# Altium PCB main.PcbDoc
Units mm, origin at the board's own origin, x right, y up, seen from the top; angles counter-clockwise.
Board outline 30 x 30 mm, 2 copper layers (Top Layer, Bottom Layer); 51 components, 33 nets, 109 pads, 0 vias.
Unrouted connection lines stored in the file: 53.
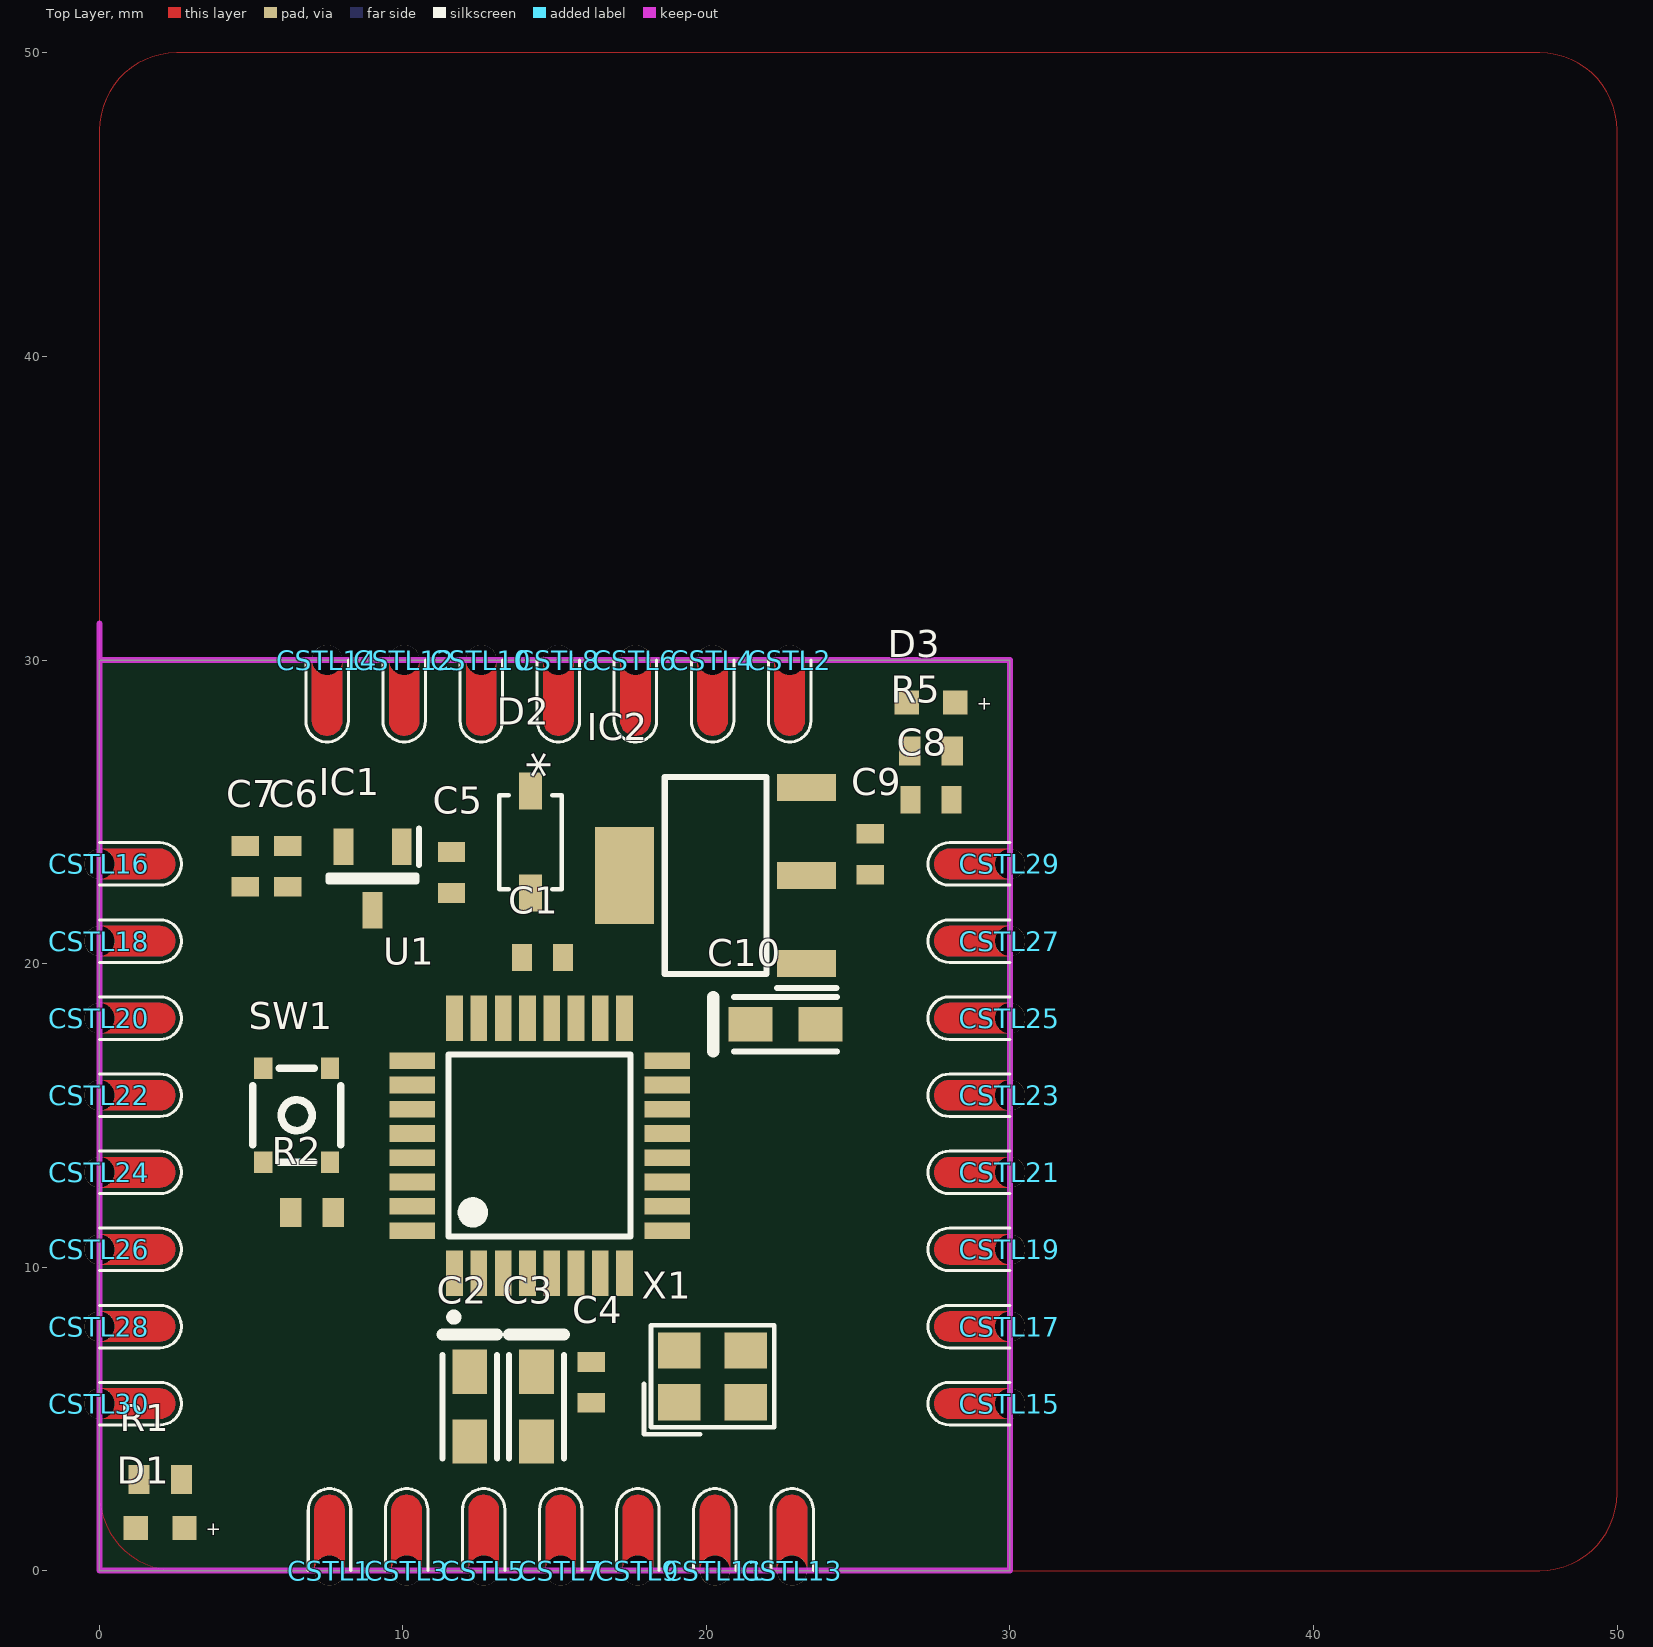
[diagram p0: Top Layer view]
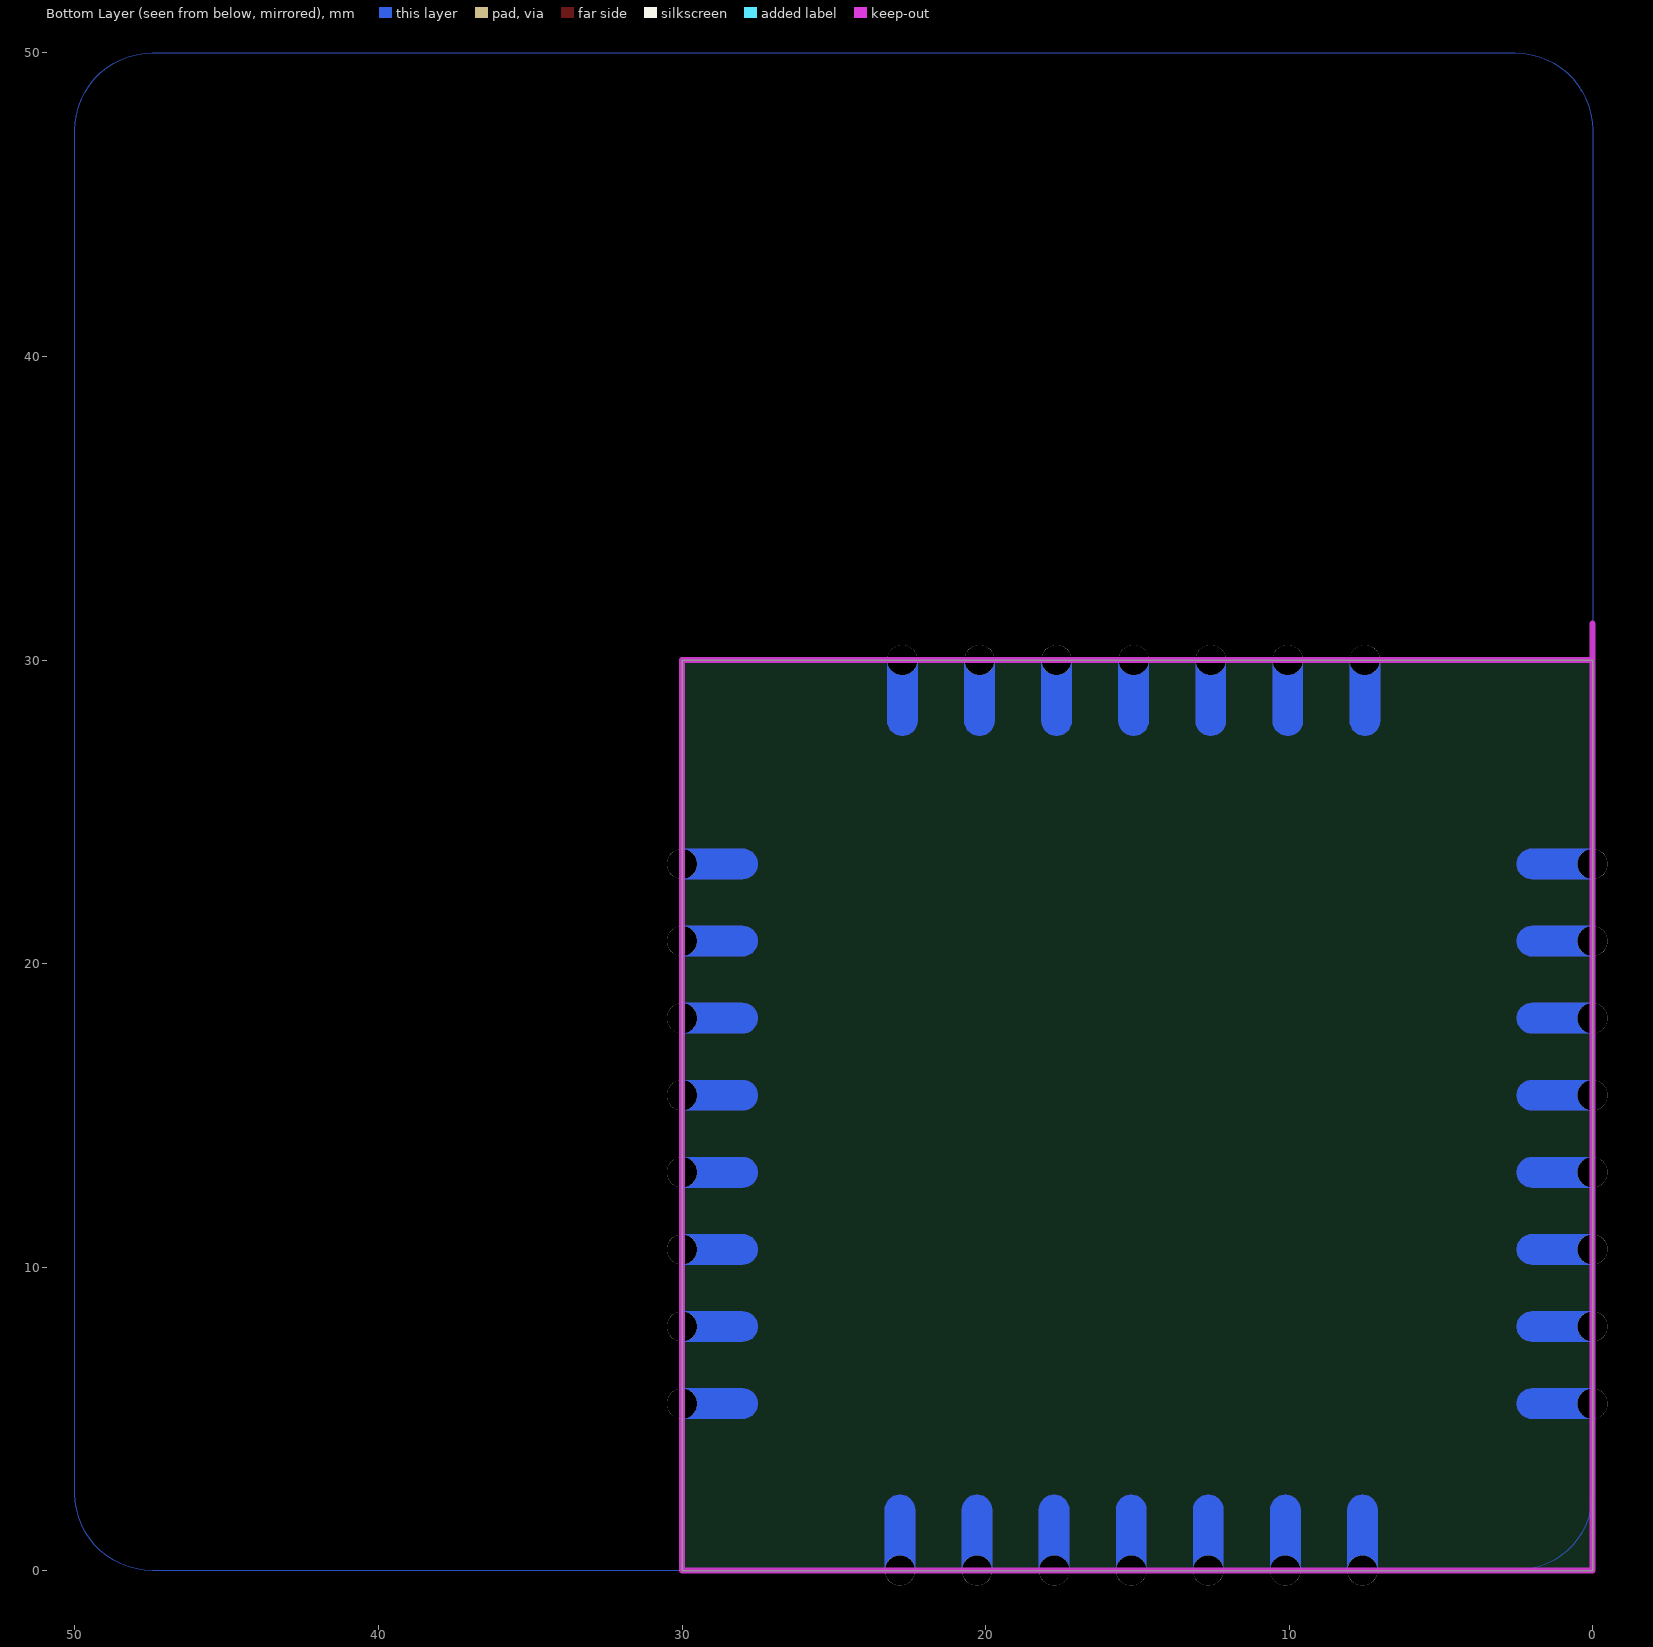
[diagram p1: Bottom Layer view, seen from below]

## Layer stack, top to bottom
Top Solder: solder mask 0.0102, Solder Resist, Dk 3.5
Top Layer: signal copper 0.0356
Dielectric 1: dielectric 0.32, FR-4, Dk 4.8
Bottom Layer: signal copper 0.0356
Bottom Solder: solder mask 0.0102, Solder Resist, Dk 3.5

## Board outline
0,0 0,30 30,30 30,0

## Design rules (kind name [scope] priority, off if disabled: settings)
Clearance Polygon [InPolygon] p1: gap=0.254 ignorepadtopadclearanceinfootprint=FALSE
Clearance "Fine Pitch" [InComponent('')] p2: gap=0.2 ignorepadtopadclearanceinfootprint=FALSE
Clearance [All] p3: gap=0.203 ignorepadtopadclearanceinfootprint=FALSE
MinimumSolderMaskSliver [All] p1 off: minsoldermaskwidth=0.254
PlaneConnect [All] p1: planeconnectstyle=Direct reliefexpansion=0.508 reliefentries=4 reliefconductorwidth=0.254 reliefairgap=0.254
PolygonConnect [All] p1: connectstyle=Direct reliefconductorwidth=0.254 reliefentries=4 polygonreliefangle="90 Angle" airgapwidth=0.254
RoutingVias [All] p1: holewidth=0.4 width=0.9 viastyle="Through Hole" minholewidth=0.4 minwidth=0.9 maxholewidth=0.4 maxwidth=0.9
SilkToSilkClearance [All] p1 off: silktosilkclearance=0.254
SilkToSolderMaskClearance [IsPad] p1 off: minsilkscreentomaskgap=0.254 clearancetoexposedcopper=TRUE
SolderMaskExpansion SolderMaskExpansion_Via [IsVia] p1: expansion=0.102 istentingtop=TRUE
SolderMaskExpansion [All] p2: expansion=0.102 istentingtop=FALSE
Width [All] p1: maxlimit=1.27 minlimit=0.203 preferedwidth=0.381
26 further rules are at their usual default settings.

## Components (designator, comment, footprint, x,y, rotation, side; value= is the part's Value field where it differs from the comment)
C1 "100nF/50V/0603" C0603_L 14.6,20.2 r180 top
C2 "4.7uF/16V/3216" KEMT-T491-A_L 12.2,5.4 r270 top
C3 "4.7uF/16V/3216" KEMT-T491-A_L 14.4,5.4 r270 top
C4 "100nF/50V/0603" C0603_L 16.2,6.2 r90 top
C5 "10uF/16V/0603" C0603_L 11.6,23 r90 top
C6 "100nF/50V/0603" C0603_L 6.2,23.2 r90 top
C7 "10uF/16V/0603" C0603_L 4.8,23.2 r90 top
C8 "10uF/16V/0603" C0603_L 27.4,25.4 r180 top
C9 "100nF/50V/0603" C0603_L 25.4,23.6 r270 top
C10 "100uF/16V/3216" KEMT-T491-A_L 22.6,18 r0 top
CSTL1 "CASTELLATED" CASTELLATED 7.58,0 r0 top
CSTL2 "CASTELLATED" CASTELLATED 22.74,30 r180 top
CSTL3 "CASTELLATED" CASTELLATED 10.12,0 r0 top
CSTL4 "CASTELLATED" CASTELLATED 20.2,30 r180 top
CSTL5 "CASTELLATED" CASTELLATED 12.66,0 r0 top
CSTL6 "CASTELLATED" CASTELLATED 17.66,30 r180 top
CSTL7 "CASTELLATED" CASTELLATED 15.2,0 r0 top
CSTL8 "CASTELLATED" CASTELLATED 15.12,30 r180 top
CSTL9 "CASTELLATED" CASTELLATED 17.74,0 r0 top
CSTL10 "CASTELLATED" CASTELLATED 12.58,30 r180 top
CSTL11 "CASTELLATED" CASTELLATED 20.28,0 r0 top
CSTL12 "CASTELLATED" CASTELLATED 10.04,30 r180 top
CSTL13 "CASTELLATED" CASTELLATED 22.82,0 r0 top
CSTL14 "CASTELLATED" CASTELLATED 7.5,30 r180 top
CSTL15 "CASTELLATED" CASTELLATED 30,5.5 r90 top
CSTL16 "CASTELLATED" CASTELLATED 0,23.28 r270 top
CSTL17 "CASTELLATED" CASTELLATED 30,8.04 r90 top
CSTL18 "CASTELLATED" CASTELLATED 0,20.74 r270 top
CSTL19 "CASTELLATED" CASTELLATED 30,10.58 r90 top
CSTL20 "CASTELLATED" CASTELLATED 0,18.2 r270 top
CSTL21 "CASTELLATED" CASTELLATED 30,13.12 r90 top
CSTL22 "CASTELLATED" CASTELLATED 0,15.66 r270 top
CSTL23 "CASTELLATED" CASTELLATED 30,15.66 r90 top
CSTL24 "CASTELLATED" CASTELLATED 0,13.12 r270 top
CSTL25 "CASTELLATED" CASTELLATED 30,18.2 r90 top
CSTL26 "CASTELLATED" CASTELLATED 0,10.58 r270 top
CSTL27 "CASTELLATED" CASTELLATED 30,20.74 r90 top
CSTL28 "CASTELLATED" CASTELLATED 0,8.04 r270 top
CSTL29 "CASTELLATED" CASTELLATED 30,23.28 r90 top
CSTL30 "CASTELLATED" CASTELLATED 0,5.5 r270 top
D1 "Red, 2V" WL-SMCW_0603_H=0.7mm 2,1.4 r0 top
D2 "1N5819HW-7-F" SOD-123 14.2,24 r270 top
D3 "Red, 2V" WL-SMCW_0603_H=0.7mm 27.4,28.6 r0 top
IC1 "AP7313-33SAG-7" SOT96P240X110-3N 9,22.8 r270 top
IC2 "AMS1117-5.0" SOT290P700X180-4N 20.3,22.9 r180 top
R1 "1k/0603" R0603_N 2,3 r180 top
R2 "1k/0603" R0603_N 7,11.8 r0 top
R5 "1k/0603" R0603_N 27.4,27 r180 top
SW1 "SKSHAAE010" SW-SMD_4P-L3.2-W2.9-P2.20-LS3.4 6.5,15 r90 top
U1 "ATmega328P-AU" FP-32A-MFG 14.5,14 r90 top
X1 "16MHz" CRYSTAL-SMD_4P-L3.2-W2.5-BL 20.2,6.4 r0 top

## Footprints (in the part's own frame and the unit in brackets; to place one, negate y for a bottom-side part, rotate by r counter-clockwise, add the part's x,y. Pads: shape width x height; smd on the part's side, far side on the other; paste and mask are expansions set on the pad)
C0603_L [mm] "Chip Capacitor, 2-Leads, Body 1.60x0.82mm, IPC High Density"
  rect 0.65x0.9 smd: 1(-0.675,0) 2(0.675,0)
  body extent -0.85,-0.48 0.85,0.48, height 0.6
CASTELLATED [mm]
  round 1 hole 1: 0(0,0)
  Multi-Layer region: -0.5,0 -0.5,2 -0.45,2.217 -0.312,2.391 -0.111,2.487 0.111,2.487 0.312,2.391 0.45,2.217 0.5,2 0.5,2 0.5,0
  silkscreen extent -0.7,0 0.7,2.7
CRYSTAL-SMD_4P-L3.2-W2.5-BL [mm]
  rect 1.4x1.2 smd: 1(-1.1,-0.85) 2(1.1,-0.85) 3(1.1,0.85) 4(-1.1,0.85)
  silkscreen extent -2.26,-1.91 2.03,1.68, body extent -1.6,-1.2 1.6,1.3, height 0.61
FP-32A-MFG [mm]
  rect 1.5x0.55 smd paste+0 mask+0: 1(-4.2,2.8) 2(-4.2,2) 3(-4.2,1.2) 4(-4.2,0.4) 5(-4.2,-0.4) 6(-4.2,-1.2) 7(-4.2,-2) 8(-4.2,-2.8) 17(4.2,-2.8) 18(4.2,-2) 19(4.2,-1.2) 20(4.2,-0.4) 21(4.2,0.4) 22(4.2,1.2) 23(4.2,2) 24(4.2,2.8)
  rect 0.55x1.5 smd paste+0 mask+0: 9(-2.8,-4.2) 10(-2,-4.2) 11(-1.2,-4.2) 12(-0.4,-4.2) 13(0.4,-4.2) 14(1.2,-4.2) 15(2,-4.2) 16(2.8,-4.2) 25(2.8,4.2) 26(2,4.2) 27(1.2,4.2) 28(0.4,4.2) 29(-0.4,4.2) 30(-1.2,4.2) 31(-2,4.2) 32(-2.8,4.2)
  silkscreen extent -5.77,-3 3,3, body extent -5.05,-5.05 5.05,5.05, height 0.25
KEMT-T491-A_L [mm] "Molded Capacitor, 2-Leads, Body 3.40x1.80mm, IPC High Density"
  rect 1.45x1.15 smd: 1(-1.15,0) 2(1.15,0)
  silkscreen extent -2.37,-0.9 1.7,0.9, body extent -1.7,-0.91 1.7,0.89, height 1.78
R0603_N [mm]
  rect 0.7x0.95 smd: 1(-0.7,0) 2(0.7,0)
  body extent -0.85,-0.48 0.85,0.47, height 0.6
SOD-123 [mil]
  rect 48x30 smd paste+0 mask+0: 1(-66,0) 2(66,0)
  silkscreen extent -61,-41 61,41, body extent -76,-36 76,36, height 53
SOT96P240X110-3N [mm]
  rect 1.2x0.65 smd: 1(-1.05,0.96) 2(-1.05,-0.96) 3(1.05,0)
  silkscreen extent -1.65,-1.45 0.1,1.54, body extent -1.2,-1.45 1.2,1.45, height 1.1
SOT290P700X180-4N [mm]
  rect 1.95x0.9 smd: 1(-3,2.9) 2(-3,0) 3(-3,-2.9)
  rect 1.95x3.2 smd: 4(3,0)
  silkscreen extent -3.98,-3.25 1.68,3.7, body extent -3.5,-3.25 3.5,3.25, height 1.8
SW-SMD_4P-L3.2-W2.9-P2.20-LS3.4 [mm]
  rect 0.7x0.6 smd: 1(-1.55,1.1) 2(-1.55,-1.1) 3(1.55,1.1) 4(1.55,-1.1)
  silkscreen extent -1.55,-1.45 1.55,1.45, body extent -1.72,-1.46 1.72,1.5, height 0.41
WL-SMCW_0603_H=0.7mm [mm] "SMD Mono-color Chip LED, body 1.6x0.8mm"
  rect 0.8x0.8 smd: 1(-0.8,0) 2(0.8,0)
  body extent -0.8,-0.4 0.8,0.4, height 0.7

## Part data
C1 C4 C5 C6 C7 C8 C9: library part C_SMD
C2 C3 C10: library part CMP-2000-07187-1, "Tantalum Capacitor, 2.2 uF, +/- 10%, 16 V, -55 to 125 degC, 2-Pin SMD, RoHS, Tape and Reel", Capacitance=2200000pF, Case Code=A, Case Style=Molded, Manufacturer=Kemet, Operating Temp Range=-55Cto125C, Package / Case=3216-18, Package Description="2-Pin Surface Mount Device, Body 3.2 x 1.6 mm", Package Reference=T491-A, Tolerance (+ or -)=10%, Voltage=16VDC, Construction=SMTChip, Datasheet URL=http://capacitoredge.kemet.com/capedge2/DataSheet/Datasheet-T491A225K016AT.pdf?pn=T491A225K016AT, Datasheet Version=10/2016, DCL=0.4uA, DF=6%, ESR=6ohm, Failure Rate=NotRequired, Insulation=NotRequired, Lead Spacing (nom)=NotRequiredmm, Length W/Weld=NotRequiredmm, Length W/Weld (max)=NotRequiredmm, Manufacturer URL=http://www.kemet.com/, Mounting Style=SurfaceMount, Mounting Technology=SurfaceMount, Packaging=TapeandReel, Polarity=Polar, Product Depth (mm)=1.6mm, Product Diameter (mm)=NotRequiredmm, Product Height (mm)=1.6mm, Product Length (mm)=3.2mm, Rad Hardened=No, Seal=NotRequired, Seated Plane Height=NotRequiredmm, Wire Form=NotRequired
D1 D3: library part 150060RS75000, "WL-SMCW SMT Mono-color Chip LED Waterclear, size 0603, Red, 2V, 140deg", Emitting Color=Red, Forward Voltage typ.=2V, Operating Temperature="-40 to +85degC", Chip Technology=AlInGaP, ComponentLink1Description=Manufacturer, ComponentLink1URL=http://www.we-online.de, ComponentLink2Description=Datasheet, ComponentLink2URL=https://www.we-online.com/catalog/datasheet/150060RS75000.pdf, Dominant Wavelength typ.=625nm, Luminous Intensity typ.=250mcd, Mounting Technology=SMT, Packaging="Tape and Reel", Part Number=150060RS75000, Peak Wavelength typ.=630nm, Published Date="December 2019", Publisher="Wurth Elektronik", Size=0603, Viewing Angle=140deg
D2: "DIODE SCHOTTKY 40V 1A SOD123", Case/Package=SOT-23, Collector Base Voltage (VCBO)=40V, Collector Emitter Breakdown Voltage=25V, Collector Emitter Saturation Voltage=500mV, Emitter Base Voltage (VEBO)=5V, Manufacturer=MCC, Manufacturer Part Number=MMSS8050-H-TP, Max Collector Current=1.5A, Max Operating Temperature=150°C, Max Power Dissipation=625mW, Min Operating Temperature=-55°C, Package Quantity=3000, Transition Frequency=100MHz, Collector Emitter Voltage (VCEO)=500mV, ComponentLink1Description=https://datasheet.ciiva.com/16291/mmss8050-255048-16291447.pdf?src-supplier=Mouser, ComponentLink1URL=https://datasheet.ciiva.com/16291/mmss8050-255048-16291447.pdf?src-supplier=Mouser, ComponentLink2Description=https://datasheet.ciiva.com/972/mmss8050sot-23-972893.pdf?src-supplier=Digi-Key, ComponentLink2URL=https://datasheet.ciiva.com/972/mmss8050sot-23-972893.pdf?src-supplier=Digi-Key, ComponentLink3Description=https://datasheet.ciiva.com/972/mmss8050sot-23-972894.pdf?src-supplier=Digi-Key, ComponentLink3URL=https://datasheet.ciiva.com/972/mmss8050sot-23-972894.pdf?src-supplier=Digi-Key, ComponentLink4Description=https://datasheet.ciiva.com/972/mmss8050sot-23-972895.pdf?src-supplier=Digi-Key, ComponentLink4URL=https://datasheet.ciiva.com/972/mmss8050sot-23-972895.pdf?src-supplier=Digi-Key, Element Configuration=Single, Gain Bandwidth Product=100MHz, hFE Min=120, Lead Free="Lead Free", Max Breakdown Voltage=25V, Mount="Surface Mount", Number of Pins=3, Packaging="Tape and Reel", Polarity=NPN, Pricing 1="1 = 0,20000, 10 = 0,18200, 25 = 0,17280, 100 = 0,09890, 250 = 0,07336, 500 = 0,06090, 1000 = 0,04152 (USD)", RoHS=Yes, Stock 1=71382, Supplier 1=Digi-Key
IC1: "Integrated Circuit", Manufacturer_Name="Diodes Inc.", Mouser Part Number=621-AP7313-33SAG-7, Arrow Part Number=AP7313-33SAG-7, Arrow Price/Stock=https://www.arrow.com/en/products/ap7313-33sag-7/diodes-incorporated?region=nac, Datasheet Link=https://componentsearchengine.com/Datasheets/1/AP7313-33SAG-7.pdf, Height=1.1mm, Manufacturer_Part_Number=AP7313-33SAG-7, Mouser Price/Stock=https://www.mouser.co.uk/ProductDetail/Diodes-Incorporated/AP7313-33SAG-7?qs=vIZ3oKQCLxqCi%2Fx0D85D2g%3D%3D
IC2: "Integrated Circuit", Manufacturer_Name=Shikues, Datasheet Link=https://datasheet.lcsc.com/szlcsc/SK-AMS1117-5-0_C165483.pdf, Height=1.8mm, Manufacturer_Part_Number=AMS1117-5.0
R1 R2 R5: library part R_SMD
SW1: "SWITCH", BOM_Manufacturer="ALPS Electric", BOM_Manufacturer Part=SKSHAAE010, BOM_Supplier=LCSC, BOM_Supplier Part=C262415, Contributor=LCSC, spicePre=S, spiceSymbolName=SKSHAAE010
U1: library part CMP-06276-000013-1, "IC MCU 8BIT 32KB FLASH 32TQFP", Frequency=20MHz, Manufacturer=Microchip, Max Supply Voltage=5.5V, Min Supply Voltage=1.8V, Nominal Supply Current=0.04-5.2mA, Package=32A, Temperature="-40°C to +85°C", Temperature Range High=+85°C, Temperature Range Low=-40°C, Automotive=No, Category=IC, ComponentLink2Description=Datasheet, ComponentLink2URL=http://ww1.microchip.com/downloads/en/DeviceDoc/ATmega48A-PA-88A-PA-168A-PA-328-P-DS-DS40002061A.pdf, Core Architecture=AVR, Data Bus Width=8bits, Device Class L1="Integrated Circuits (ICs)", Device Class L2="Embedded Processors and Controllers", Device Class L3=Microcontrollers, Digikey Description="IC MCU 8BIT 32KB FLASH 32TQFP", Footprint Url=http://ww1.microchip.com/downloads/en/appnotes/atmel-8826-seeprom-pcb-mounting-guidelines-surface-mount-packages-applicationnote.pdf, Height=1.2mm, Interface=I2C,SPI,UART,USART,2-Wire, Ipc Land Pattern Name=QFP80P900X900X120-32, Lead Free=Yes, Manufacturer Part Number=ATmega328P-AU, Memory Size=32KBytes, Memory Type=FLASH, Mouser Description="ATmega Series 32 KB Flash 2 KB SRAM 20 MHz 8-Bit Microcontroller - TQFP-32", Number Of A/D Converters=1, Number Of Adc Channels=8, Number Of Cores=1, Number Of I2C Channels=1, Number Of I/Os=23, Number Of Pwm Channels=6, Number Of Spi Channels=1, Number Of Timers/Counters=3, Number Of Uart Channels=1, Octopart=https://octopart.com/atmega328p-au-microchip-77760215, Ram Size=2KBytes, RoHS=TRUE, Standoff Height=0.05mm
X1: BOM_JLCPCB Part Class="Extended Part", BOM_Manufacturer=YXC, BOM_Manufacturer Part=X322516MOB4SI, BOM_Paste Type="Extended Part", BOM_Supplier=LCSC, BOM_Supplier Part=C12668, nameAlias=Frequency, spicePre=X, spiceSymbolName=X322516MOB4SI

## Nets (pads, with @x,y where several pads share a name; then routed paths per layer and width w, separated by ;. In a path a pad name is that pad's centre, name@x,y a point inside that pad or via, vN(x,y) a via of type N, cw(c..) or ccw(c..) an arc to the next point about the centre after c; other vN are vias at no path point)
3V3: C6.2 C7.2 CSTL28.0 IC1.2
5V: C2.1 C3.1 C4.2 C9.2 C10.1 CSTL8.0 D2.2 IC2.2 IC2.4 R2.1 U1.4 U1.6 U1.18
A0: CSTL24.0 U1.23
A1: CSTL22.0 U1.24
A2: CSTL20.0 U1.25
A3: CSTL18.0 U1.26
A4: CSTL16.0 U1.27
A5: CSTL14.0 U1.28
A6: CSTL12.0 U1.19
A7: CSTL10.0 U1.22
AREF: C1.1 CSTL26.0 U1.20
D0/RX: CSTL3.0 U1.30
D1/TX: CSTL1.0 U1.31
D2: CSTL9.0 U1.32
D3: CSTL11.0 U1.1
D4: CSTL13.0 U1.2
D5: CSTL15.0 U1.9
D6: CSTL17.0 U1.10
D7: CSTL19.0 U1.11
D8: CSTL21.0 U1.12
D9: CSTL23.0 U1.13
D10: CSTL25.0 U1.14
D11/MOSI: CSTL27.0 U1.15
D12/MISO: CSTL29.0 U1.16
D13/SCK: CSTL30.0 R1.2 U1.17
GND: C1.2 C2.2 C3.2 C4.1 C5.1 C6.1 C7.1 C8.1 C9.1 C10.2 CSTL4.0 CSTL7.0 D1.1 D3.1 IC1.3 IC2.1 SW1.3 U1.3 U1.5 U1.21 X1.2 X1.4
NANO_RST: R2.2 SW1.2 U1.29
NetD1_2: D1.2 R1.1
NetD3_2: D3.2 R5.1
RESET: CSTL5.0 CSTL6.0
VIN: C5.2 C8.2 CSTL2.0 D2.1 IC1.1 IC2.3 R5.2
XTAL1: U1.7 X1.1
XTAL2: U1.8 X1.3
pads on no net: SW1.1 SW1.4

## Polygon pours and split planes (outlines as drawn)
GND on Top Layer "NONET_L01_P013" (solid, remove dead copper, shelved, pour order 13): 2.54,0 47.46,0 ccw(c47.46,2.54) 50,2.54 50,47.46 ccw(c47.46,47.46) 47.46,50 2.54,50 ccw(c2.54,47.46) 0,47.46 0,2.54 ccw(c2.54,2.54)
GND on Bottom Layer "NONET_L02_P015" (solid, remove dead copper, shelved, pour order 15): 2.54,0 47.46,0 ccw(c47.46,2.54) 50,2.54 50,47.46 ccw(c47.46,47.46) 47.46,50 2.54,50 ccw(c2.54,47.46) 0,47.46 0,2.54 ccw(c2.54,2.54)

## Keep-outs
Keep-Out Layer:
  lines w0.2: 0,0 30,0 30,30 0,30 0,31.2 0,0

## Silkscreen, mask and mechanical layers (free items; w line width, h text height)
Top Overlay:
  drawing of 5 lines, arcs and shapes, not listed
  text "V1.0. Rev A /  / 2021.03.28" at 57.6,57.8 h1.5
  text "PROJECT NAME / SEITECHS" at 55.6,52.2 h1.5
Bottom Overlay:
  text "PROJECT NAME / SEITECHS" at 70,16.1 h1.5

## Dimensions
30,30 to 30,0 on Mechanical 1
0,31.2 to 30,0 on Mechanical 1

## Text inside footprints (layer, text, board x,y; h text height)
D1: Top Overlay "+" at 4.1,1.1 h0.76 r90
D2: Top Overlay "*" at 13.565,26.985 h1.27 r270; Mechanical 13 "*" at 13.565,25.486 h1.27 r270
D3: Top Overlay "+" at 29.5,28.3 h0.76 r90